# EAGLE board SingleStage (EAGLE 9.3.2)
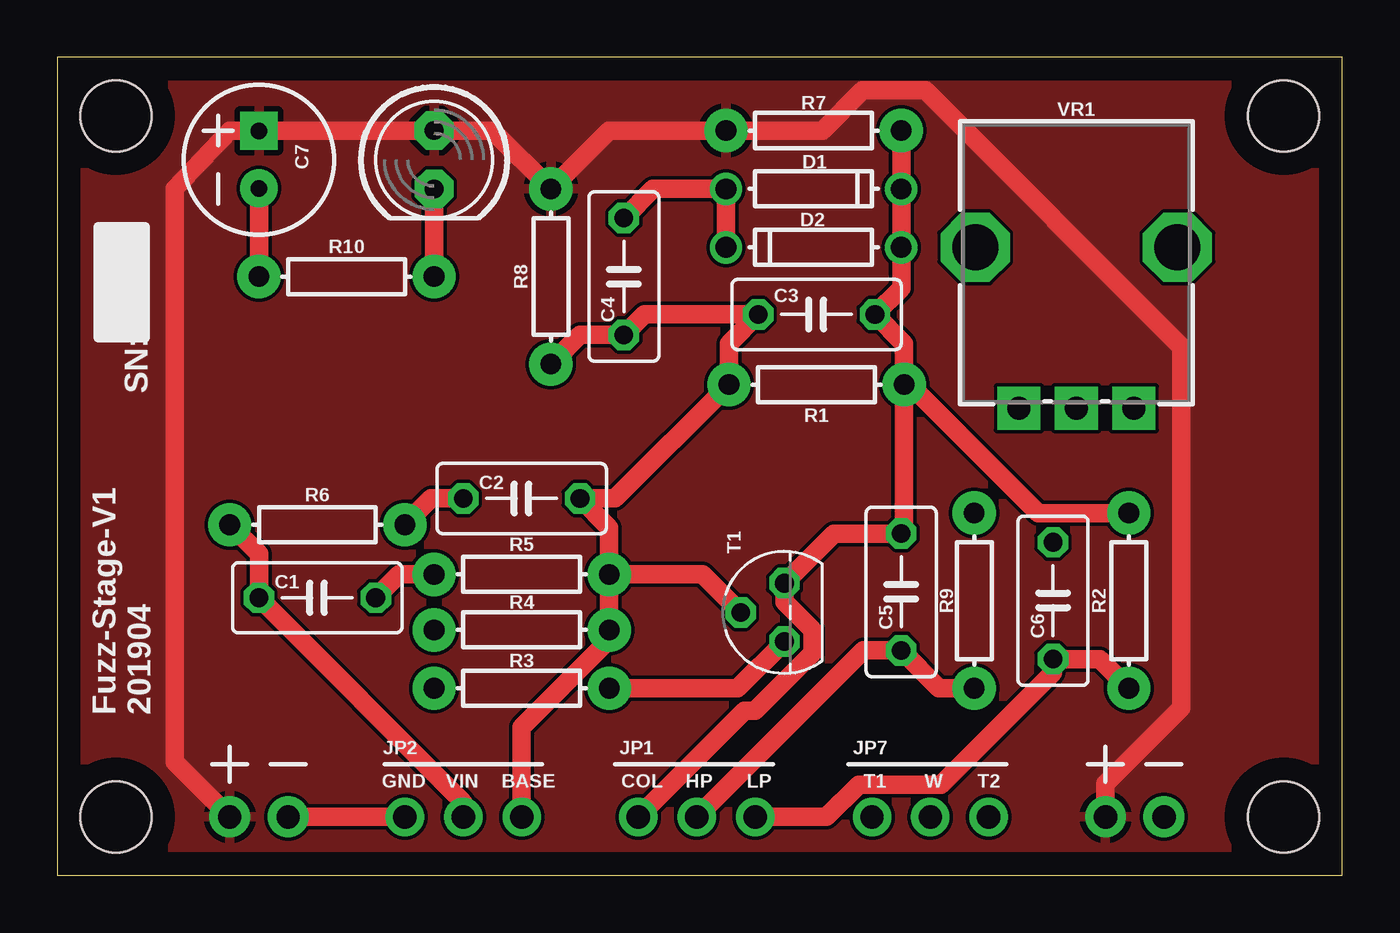
[diagram p0: board, top side]
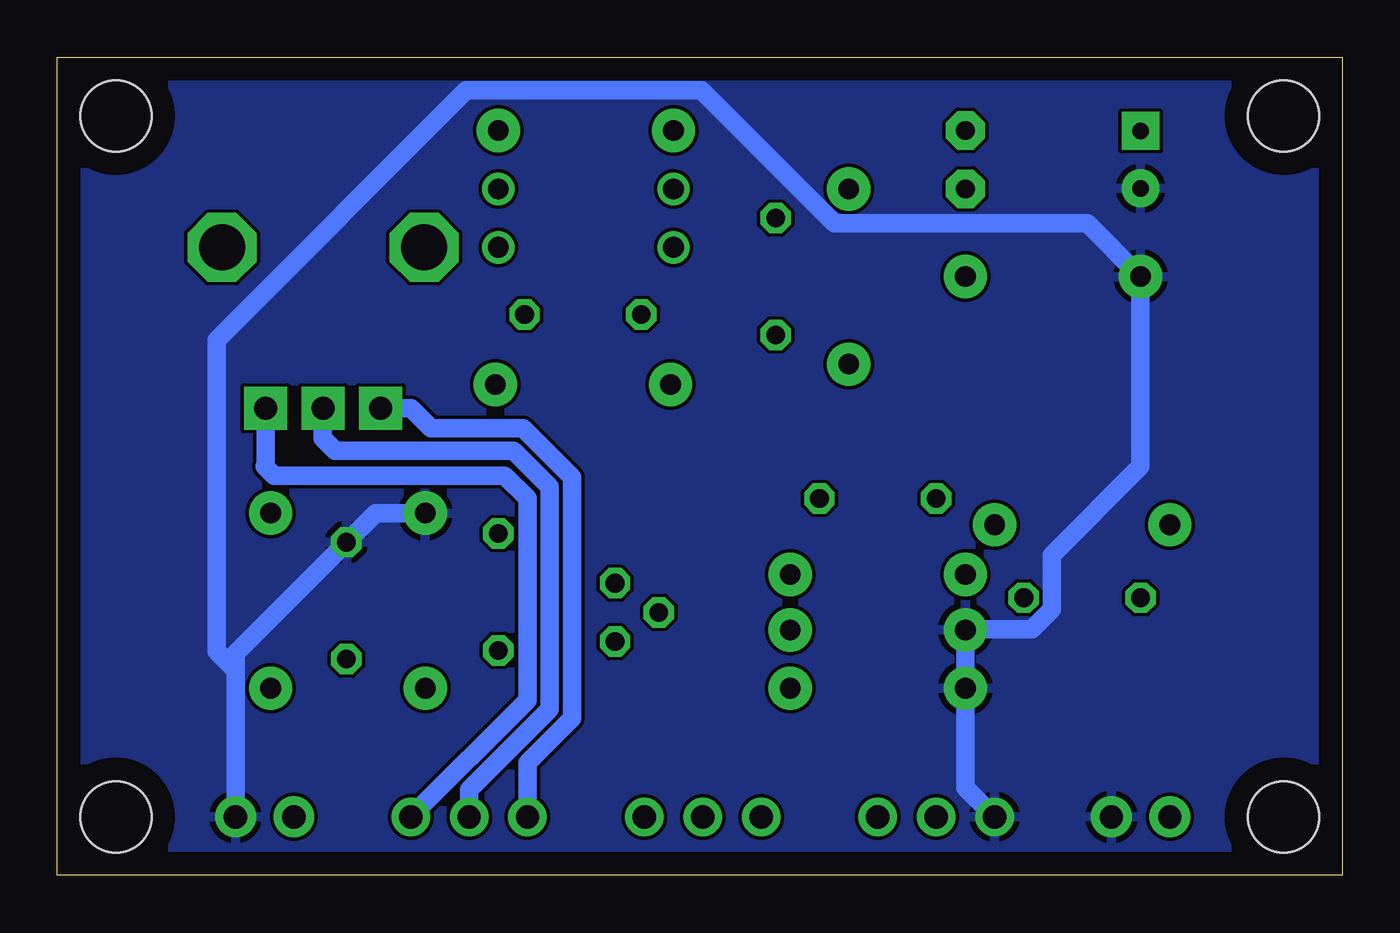
[diagram p1: board, bottom side, seen from below]

Size 55.88 x 35.56 mm. Coordinates in mm from the lower left corner, seen from the top.
Outline: 0,0 55.88,0 55.88,35.56 0,35.56 0,0
Copper layers (1*16): Top 0.035mm / dielectric 1.5mm / Bottom 0.035mm
Design rules "default": minimum track width 6mil, minimum drill 0.35mm, track to track 6mil, track to pad 6mil, pad to pad 6mil, via to via 6mil, smd to smd 6mil, copper to edge 40mil, drill to drill 6mil, minimum pad ring 10mil, minimum via ring 8mil, stop-mask expansion 4mil, vias tented up to drill 0mil, thermal gap 10mil
Holes 3.1 mm at 2.54,33.02 2.54,2.54 53.34,2.54 53.34,33.02

## Footprints (pad centres in the part's own frame; a part is rotated, then mirrored left to right if it is on the bottom)
C050-030X075 = drill 0.813 octagon: 1 -2.54,0; 2 2.54,0
CPOL-RADIAL-2.5MM-6.5MM = drill 0.7 pad 1.651 square: 1 1.25,0 | drill 0.7 pad 1.651: 2 -1.25,0
DO-1N4148 = drill 0.9: A -3.81,0; C 3.81,0
1X03-CLEANBIG = drill 1.016 pad 1.676: 1 -2.54,0; 2 0,0; 3 2.54,0
1X01-CLEANBIG = drill 1.016 pad 1.778: 1 0,0
LED5MM = drill 0.813 pad 1.676 octagon: A -1.27,0; K 1.27,0
AXIAL-0.3 = drill 0.9 pad 1.88: P$1 -3.81,0; P$2 3.81,0
TO92 = drill 0.813 octagon: 1 1.27,0; 2 0,1.905; 3 -1.27,0
POT-PTH-ALPS = drill 1 pad 1.88 square: P$1 7,-2.5; P$2 7,0; P$3 7,2.5 | drill 2 octagon: P$4 0,-4.4; P$5 0,4.4

## Placement (x,y rotation side)
C1  [C050-030X075]  11.3,12.06 180 top
C2  [C050-030X075]  20.19,16.38 180 top
C3  [C050-030X075]  33.02,24.38 180 top
C4  [C050-030X075]  24.64,26.04 270 top
C5  [C050-030X075]  36.7,12.32 90 top
C6  [C050-030X075]  43.31,11.94 90 top
C7  100uF  [CPOL-RADIAL-2.5MM-6.5MM]  8.76,31.11 90 top
D1  [DO-1N4148]  32.89,29.84 0 top
D2  [DO-1N4148]  32.89,27.3 180 top
JP1  [1X03-CLEANBIG]  27.81,2.54 0 top
JP2  [1X03-CLEANBIG]  17.65,2.54 0 top
JP3  [1X01-CLEANBIG]  7.49,2.54 0 top
JP4  [1X01-CLEANBIG]  10.03,2.54 0 top
JP5  [1X01-CLEANBIG]  48.13,2.54 0 top
JP6  [1X01-CLEANBIG]  45.59,2.54 0 top
JP7  [1X03-CLEANBIG]  37.97,2.54 0 top
LED1  [LED5MM]  16.38,31.11 270 top
R1  [AXIAL-0.3]  33.02,21.34 180 top
R2  [AXIAL-0.3]  46.61,11.94 90 top
R3  [AXIAL-0.3]  20.19,8.13 180 top
R4  [AXIAL-0.3]  20.19,10.67 180 top
R5  [AXIAL-0.3]  20.19,13.08 0 top
R6  [AXIAL-0.3]  11.3,15.24 0 top
R7  [AXIAL-0.3]  32.89,32.38 180 top
R8  [AXIAL-0.3]  21.46,26.04 90 top
R9  [AXIAL-0.3]  39.88,11.94 270 top
R10  [AXIAL-0.3]  12.57,26.04 0 top
T1  2N5089  [TO92]  31.62,11.43 90 top
VR1  10k  [POT-PTH-ALPS]  44.32,27.3 270 top

## Library data of the parts
C1-C6 D1 D2 JP1-JP7 LED1 = adafruit
C7 = SparkFun-Capacitors; PROD_ID: CAP-08439
R1-R10 = SparkFun-Resistors
T1 = transistor
VR1 = SparkFun-Resistors; PROD_ID: RES-09177; SF_SKU: COM-09288

## Nets
+9V: C7.1 JP3.1 JP6.1 LED1.A R7.P$2 R8.P$2
GND: C6.2 C7.2 JP2.1 JP4.1 JP5.1 R3.P$2 R4.P$2 R9.P$1 R10.P$1
N$1: C2.2 R6.P$2
N$2: C1.1 R5.P$1
N$3: R3.P$1 T1.3
N$4: C2.1 C3.2 C4.2 JP2.3 R1.P$2 R4.P$1 R5.P$2 R8.P$1 T1.2
N$5: C4.1 D1.A D2.C
N$6: C3.1 C5.2 D1.C D2.A JP1.1 R1.P$1 R2.P$2 R7.P$1 T1.1
N$8: C1.2 JP2.2 R6.P$1
N$10: C5.1 JP1.2 R9.P$2
N$11: C6.1 JP1.3 R2.P$1
N$12: JP7.1 VR1.P$1
N$13: JP7.2 VR1.P$2
N$15: LED1.K R10.P$2
N$17: JP7.3 VR1.P$3

## Tracks (layer width: path | path; a pad name or v marks a point on that pad's centre or on a via)
+9V
  Top 0.813: JP3.1 5.11,4.93 5.11,29.84 7.49,32.38 C7.1 LED1.A 18.92,32.38 R8.P$2 24,32.38 R7.P$2 33.27,32.38 35.02,34.13 37.75,34.13 48.9,22.99 48.9,7.28 45.59,3.98 JP6.1
  pour Top: 0,35.56 55.88,35.56 55.88,0 0,0
GND
  Top 0.813: JP4.1 JP2.1 | C7.2 R10.P$1
  Bottom 0.813: JP2.1 16.38,3.81 R3.P$2 R4.P$2 16.36,10.69 13.49,10.69 12.62,11.56 12.62,13.92 8.76,17.78 R10.P$1 11.07,28.35 22.08,28.35 27.86,34.13 38.1,34.13 48.96,23.27 48.96,9.75 48.13,8.92 JP5.1 48.13,9.65 C6.2 42.04,15.75 R9.P$1
  pour Bottom: 0,35.56 55.88,35.56 55.88,0 0,0
N$1
  Top 0.813: C2.2 16.26,16.38 R6.P$2
N$2
  Top 0.813: C1.1 14.86,13.08 R5.P$1
N$3
  Top 0.813: R3.P$1 29.59,8.13 T1.3
N$4
  Top 0.813: R8.P$1 22.73,23.5 C4.2 25.53,24.38 C3.2 29.21,23.11 R1.P$2 24.26,16.38 C2.1 24,15.11 R5.P$2 | R5.P$2 R4.P$1 24,10.25 20.19,6.44 JP2.3 | T1.2 28.07,13.08 R5.P$2
N$5
  Top 0.813: C4.1 25.91,29.84 D1.A D2.C
N$6
  Top 0.813: R1.P$1 36.83,23.11 C3.1 36.7,25.53 D2.A D1.C R7.P$1 | JP1.1 29.9,7.16 30.35,7.16 32.84,9.65 32.84,10.66 31.62,11.88 T1.1 33.78,14.86 C5.2 36.83,14.99 R1.P$1 | R1.P$1 37.08,21.34 42.67,15.75 R2.P$2
N$8
  Top 0.813: R6.P$1 8.76,13.97 C1.2 17.65,3.17 JP2.2
N$10
  Top 0.813: JP1.2 35.05,9.78 C5.1 38.35,8.13 R9.P$2
N$11
  Top 0.813: JP1.3 33.46,2.54 34.85,3.94 38.44,3.94 43.31,8.8 C6.1 45.34,9.4 R2.P$1
N$12
  Bottom 0.813: VR1.P$1 40.5,20.3 39.62,19.43 35.63,19.43 33.5,17.3 33.5,6.82 35.43,4.89 JP7.1
N$13
  Bottom 0.813: VR1.P$2 44.34,20.29 44.34,19.01 43.8,18.47 36.03,18.47 34.47,16.9 34.47,7.22 37.97,3.71 JP7.2
N$15
  Top 0.813: LED1.K R10.P$2
N$17
  Bottom 0.813: JP7.3 35.43,7.62 35.43,16.38 36.42,17.37 46.46,17.37 46.86,17.78 46.82,17.82 VR1.P$3

## Text on the board
tSilk: SN: | Fuzz-Stage-V1 / 201904 | GND | VIN | BASE | COL | HP | LP | T1 | W | T2